# EAGLE board anemometer (EAGLE 6.4)
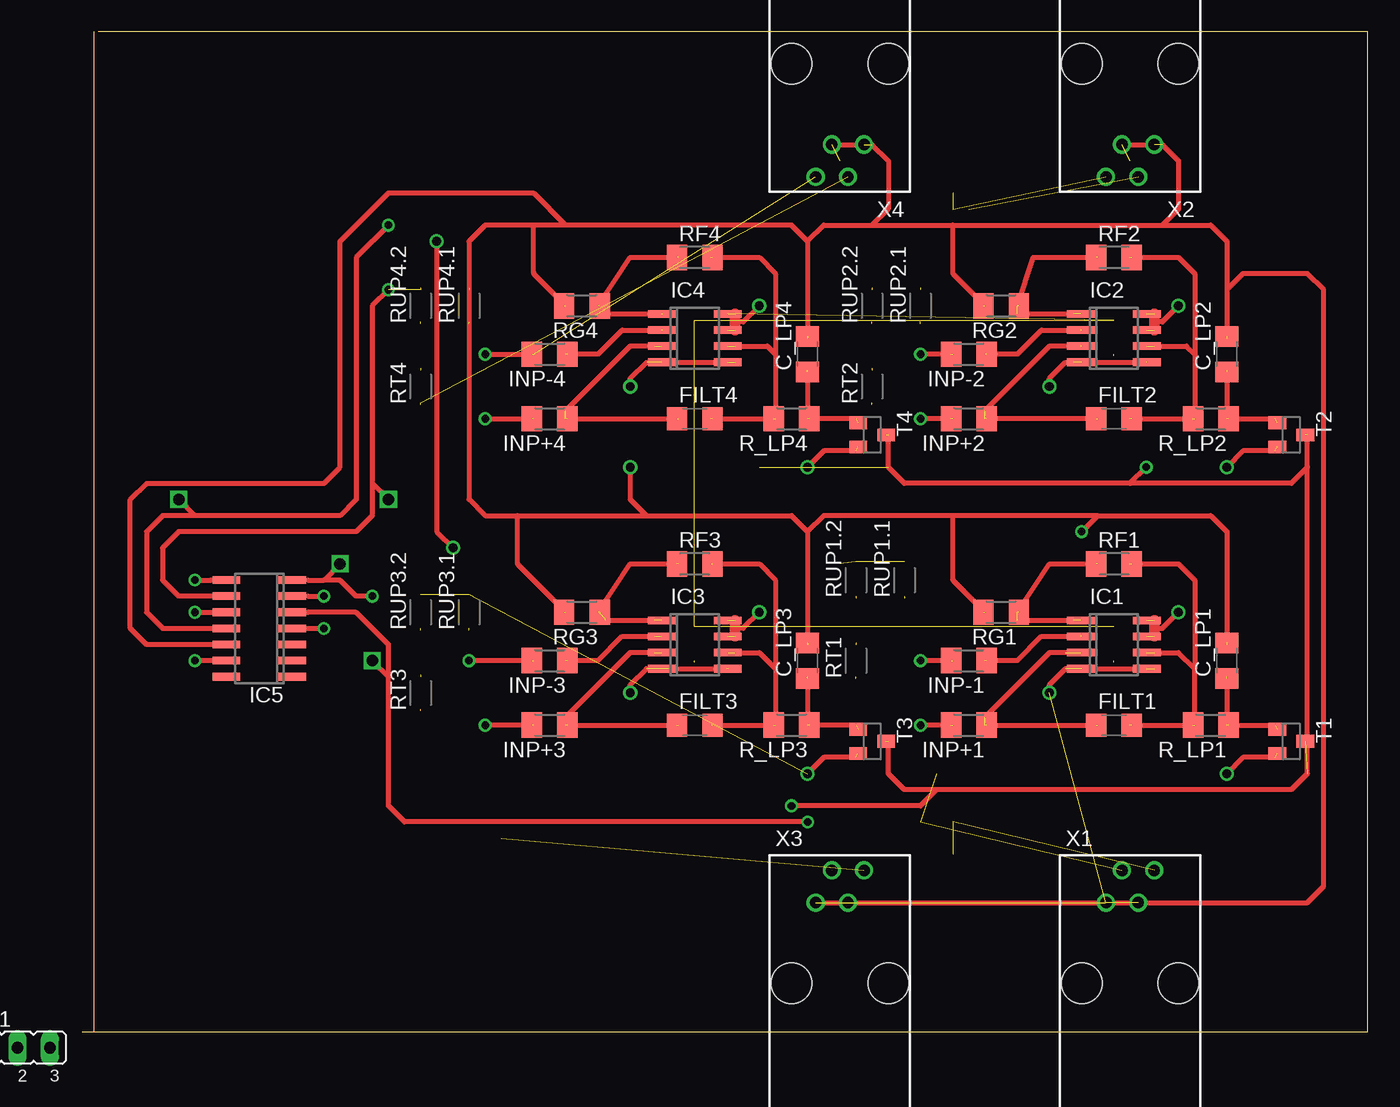
[diagram p0: board, top side]
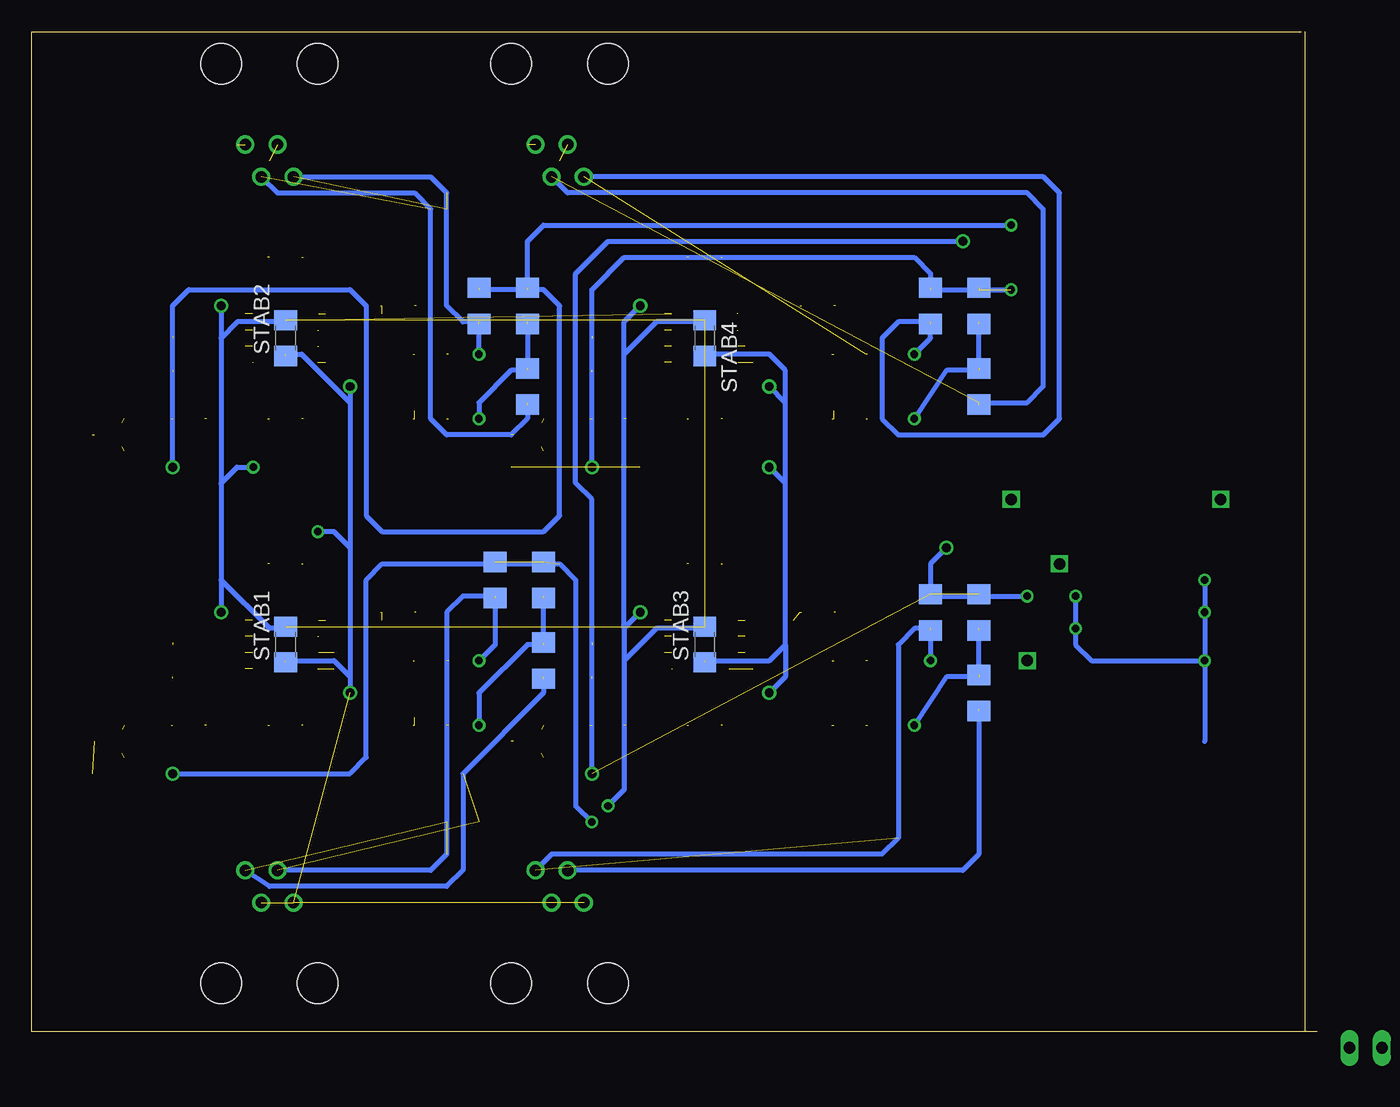
[diagram p1: board, bottom side, seen from below]

Size 101.27 x 78.73 mm. Coordinates in mm from the lower left corner, seen from the top.
Outline: 0,0 0.94,0
Outline: 0.94,0 101.27,0 101.27,78.73 1.27,78.73
Outline: 0.94,0 0.94,78.73
Copper layers (1*16): Top 0.035mm / dielectric 1.5mm / Bottom 0.035mm
Design rules "default": minimum track width 10mil, minimum drill 24mil, track to track 8mil, track to pad 8mil, pad to pad 8mil, via to via 8mil, smd to smd 8mil, copper to edge 40mil, drill to drill 8mil, minimum pad ring 10mil, minimum via ring 8mil, stop-mask expansion 4mil, vias tented up to drill 0mil, thermal gap 10mil

## Footprints (pad centres in the part's own frame; a part is rotated, then mirrored left to right if it is on the bottom)
C1206 = smd 1.6 x 1.8: 1 -1.4,0; 2 1.4,0
SO8 = smd 0.6 x 2.2: 1 -1.905,-2.6; 2 -0.635,-2.6; 3 0.635,-2.6; 4 1.905,-2.6; 5 1.905,2.6; 6 0.635,2.6; 7 -0.635,2.6; 8 -1.905,2.6
SO14 = smd 0.6 x 2.2: 1 -3.81,-2.6; 2 -2.54,-2.6; 3 -1.27,-2.6; 4 0,-2.6; 5 1.27,-2.6; 6 2.54,-2.6; 7 3.81,-2.6; 8 3.81,2.6; 9 2.54,2.6; 10 1.27,2.6; 11 0,2.6; 12 -1.27,2.6; 13 -2.54,2.6; 14 -3.81,2.6
M1206 = smd 1.6 x 2: 1 -1.4,0; 2 1.4,0
JP2 = drill 0.914 long: 1 -2.54,0; 2 0,0; 3 2.54,0
R1206 = smd 1.6 x 1.803 bottom: 1 -1.422,0; 2 1.422,0
SOT23 = smd 1 x 1.4: 1 -0.95,-1.1; 2 0.95,-1.1; 3 0,1.1
14867 = drill 0.9 pad 1.422: 1 -1.905,6.35; 2 -0.635,8.89; 3 0.635,6.35; 4 1.905,8.89 | hole 3.2: -3.81,0; 3.81,0

## Placement (x,y rotation side)
C_LP1  330nF  [C1206]  90.17,29.21 90 top
C_LP2  330nF  [C1206]  90.17,53.34 90 top
C_LP3  330nF  [C1206]  57.15,29.21 90 top
C_LP4  330nF  [C1206]  57.15,53.34 90 top
FILT1  100nF  [C1206]  81.28,24.13 0 top
FILT2  100nF  [C1206]  81.28,48.26 0 top
FILT3  100nF  [C1206]  48.26,24.13 0 top
FILT4  100nF  [C1206]  48.26,48.26 0 top
IC1  AD623R  [SO8]  81.28,30.48 270 top
IC2  AD623R  [SO8]  81.28,54.61 270 top
IC3  AD623R  [SO8]  48.26,30.48 270 top
IC4  AD623R  [SO8]  48.26,54.61 270 top
IC5  [SO14]  13.97,31.75 90 top
INP+1  100k  [M1206]  69.85,24.13 180 top
INP+2  100k  [M1206]  69.85,48.26 180 top
INP+3  100k  [M1206]  36.83,24.13 180 top
INP+4  100k  [M1206]  36.83,48.26 180 top
INP-1  100k  [M1206]  69.85,29.21 180 top
INP-2  100k  [M1206]  69.85,53.34 180 top
INP-3  100k  [M1206]  36.83,29.21 180 top
INP-4  100k  [M1206]  36.83,53.34 180 top
JP1  [JP2]  -5.08,-1.27 0 top
JP2  [JP2]  -13.97,-1.27 0 top  (outside the outline)
R_LP1  100  [M1206]  88.9,24.13 180 top
R_LP2  100  [M1206]  88.9,48.26 180 top
R_LP3  100  [M1206]  55.88,24.13 180 top
R_LP4  100  [M1206]  55.88,48.26 180 top
RF1  100k  [M1206]  81.28,36.83 0 top
RF2  100k  [M1206]  81.28,60.96 0 top
RF3  100k  [M1206]  48.26,36.83 0 top
RF4  100k  [M1206]  48.26,60.96 0 top
RG1  100  [M1206]  72.39,33.02 180 top
RG2  100  [M1206]  72.39,57.15 180 top
RG3  100  [M1206]  39.37,33.02 180 top
RG4  100  [M1206]  39.37,57.15 180 top
RT1  80  [R1206]  60.96,29.21 90 top
RT2  80  [R1206]  62.23,50.8 90 top
RT3  80  [R1206]  26.67,26.67 90 top
RT4  80  [R1206]  26.67,50.8 90 top
RUP1.1  10  [R1206]  64.77,35.56 90 top
RUP1.2  100  [R1206]  60.96,35.56 90 top
RUP2.1  10  [R1206]  66.04,57.15 90 top
RUP2.2  100  [R1206]  62.23,57.15 90 top
RUP3.1  10  [R1206]  30.48,33.02 90 top
RUP3.2  100  [R1206]  26.67,33.02 90 top
RUP4.1  10  [R1206]  30.48,57.15 90 top
RUP4.2  100  [R1206]  26.67,57.15 90 top
STAB1  100nF  [C1206]  81.28,30.48 90 bottom
STAB2  100nF  [C1206]  81.28,54.61 90 bottom
STAB3  100nF  [C1206]  48.26,30.48 90 bottom
STAB4  100nF  [C1206]  48.26,54.61 270 bottom
T1  BC846  [SOT23]  95.25,22.86 270 top
T2  BC846  [SOT23]  95.25,46.99 270 top
T3  BC846  [SOT23]  62.23,22.86 270 top
T4  BC846  [SOT23]  62.23,46.99 270 top
X1  14867  [14867]  82.55,3.81 0 top
X2  14867  [14867]  82.55,76.2 180 top
X3  14867  [14867]  59.69,3.81 0 top
X4  14867  [14867]  59.69,76.2 180 top

## Library data of the parts
C_LP1-C_LP4 FILT1-FILT4 STAB1-STAB4 = rcl
IC1-IC4 = analog-devices; MPN: AD623ARZ.; OC_FARNELL: 9426213; OC_NEWARK: 31M4186
IC5 = linear
INP+1-INP+4 INP-1-INP-4 R_LP1-R_LP4 RF1-RF4 RG1-RG4 RT1-RT4 RUP1.1 RUP1.2 RUP2.1 RUP2.2 RUP3.1 RUP3.2 RUP4.1 RUP4.2 = resistor
JP1 JP2 = jumper
T1-T4 = transistor
X1-X4 = con-4ucon; OC_FARNELL: unknown; OC_NEWARK: unknown

## Nets
AGND: IC5.8
DGND: IC5.7
GND: C_LP1.2 C_LP2.2 C_LP3.2 C_LP4.2 IC1.4 IC1.5 IC2.4 IC2.5 IC3.4 IC3.5 IC4.4 IC4.5 RG1.2 RG2.2 RG3.2 RG4.2 STAB1.1 STAB2.1 STAB3.1 STAB4.2 X1.1 X1.3 X2.1 X2.3 X3.1 X3.3 X4.1 X4.3
N$3: IC1.1 RF1.1 RG1.1
N$4: IC4.1 RF4.1 RG4.1
N$7: IC2.1 RF2.1 RG2.1
N$9: IC3.1 RF3.1 RG3.1
N$14: IC2.2 INP-2.1
N$19: IC1.2 INP-1.1
N$21: FILT2.1 IC2.3 INP+2.1
N$22: FILT3.1 IC3.3 INP+3.1
N$23: IC3.2 INP-3.1
N$24: FILT4.1 IC4.3 INP+4.1
N$25: IC4.2 INP-4.1
N$37: FILT1.1 IC1.3 INP+1.1
OUT1: C_LP1.1 R_LP1.1 T1.1
OUT1.1: FILT1.2 IC1.6 R_LP1.2 RF1.2
OUT2: C_LP2.1 R_LP2.1 T2.1
OUT2.1: FILT2.2 IC2.6 R_LP2.2 RF2.2
OUT3: C_LP3.1 R_LP3.1 T3.1
OUT3.1: FILT3.2 IC3.6 R_LP3.2 RF3.2
OUT4: C_LP4.1 R_LP4.1 T4.1
OUT4.1: FILT4.2 IC4.6 R_LP4.2 RF4.2
REF1: RT1.1 X1.2
REF2: RT2.1 X2.2
REF3: RT3.1 X3.2
REF4: RT4.1 X4.2
SUPL1: RUP1.1.2 RUP1.2.2 T1.2
SUPL2: RUP2.1.2 RUP2.2.2 T2.2
SUPL3: RUP3.1.2 RUP3.2.2 T3.2
SUPL4: RUP4.1.2 RUP4.2.2 T4.2
V1+: INP+1.2 RT1.2 RUP1.2.1
V1-: INP-1.2 RUP1.1.1 X1.4
V2+: INP+2.2 RT2.2 RUP2.2.1
V2-: INP-2.2 RUP2.1.1 X2.4
V3+: INP+3.2 RT3.2 RUP3.2.1
V3-: INP-3.2 RUP3.1.1 X3.4
V4+: INP+4.2 RT4.2 RUP4.2.1
V4-: INP-4.2 RUP4.1.1 X4.4
V+: IC1.7 IC1.8 IC2.7 IC2.8 IC3.7 IC3.8 IC4.7 IC4.8 STAB1.2 STAB2.2 STAB3.2 STAB4.1 T1.3 T2.3 T3.3 T4.3
VCC: IC5.14

## Tracks (layer width: path | path; a pad name or v marks a point on that pad's centre or on a via)
GND  (via drill 0.6, 0.7)  (33 unrouted)
  Top 0.406: v76.2,26.67 76.2,27.3 77.47,28.57 | 78.74,28.57 84.45,28.57 | 78.74,52.7 83.82,52.7 | v76.2,50.8 76.2,51.44 77.47,52.7 78.11,52.7 | 62.23,63.5 58.42,63.5 57.15,62.23 | 62.23,63.5 68.58,63.5 | 68.58,63.5 85.09,63.5 | 85.09,63.5 88.9,63.5 90.17,62.23 90.17,58.42 | 90.17,58.42 90.17,54.61 | 57.15,62.23 57.15,54.61 | 68.58,40.64 58.42,40.64 57.15,39.37 | 80.01,40.64 88.9,40.64 90.17,39.37 90.17,30.48 | 57.15,39.37 57.15,30.48 | 57.15,62.23 55.88,63.5 38.1,63.5 | 38.1,63.5 35.56,63.5 | 35.56,63.5 31.75,63.5 30.48,62.23 30.48,41.91 31.75,40.64 34.29,40.64 | 34.29,40.64 44.45,40.64 | 44.45,40.64 55.88,40.64 57.15,39.37 | 38.1,33.02 34.38,36.74 arc-45 34.29,36.96 34.29,40.64 | 38.1,57.15 35.65,59.6 arc-45 35.56,59.82 35.56,63.5 | 71.12,57.15 68.67,59.6 arc-45 68.58,59.82 68.58,63.5 | 71.12,33.02 68.67,35.47 arc-45 68.58,35.69 68.58,40.64 | v78.74,39.37 80.01,40.64 | 80.01,40.64 68.58,40.64 | v43.18,44.45 43.18,41.91 44.45,40.64 | 46.35,28.57 50.8,28.57 | 44.45,28.57 43.18,27.3 v43.18,26.67 | v43.18,50.8 43.18,51.44 44.45,52.7 51.44,52.7 | X4.3 62.23,69.85 63.5,68.58 63.5,64.77 62.23,63.5 | X2.3 85.09,69.85 86.36,68.58 86.36,64.77 85.09,63.5 | X3.1 96.52,10.16 97.79,11.43 97.79,58.42 96.52,59.69 91.44,59.69 90.17,58.42 | 10.16,30.48 5.08,30.48 3.81,31.75 3.81,41.91 5.08,43.18 19.05,43.18 20.32,44.45 20.32,62.23 24.13,66.04 35.56,66.04 38.1,63.5
  Bottom 0.406: v76.2,50.8 76.2,49.53 | 76.2,49.53 76.2,38.1 | 76.2,38.1 76.2,27.94 | 76.2,27.94 v76.2,26.67 | 76.2,38.1 77.47,39.37 v78.74,39.37 | 81.28,53.34 80.01,53.34 76.2,49.53 | 48.26,29.21 43.18,29.21 41.91,30.48 | 41.91,30.48 41.91,27.94 v43.18,26.67 | 41.91,30.48 41.91,43.18 | 41.91,43.18 v43.18,44.45 | 41.91,43.18 41.91,49.53 | 41.91,49.53 v43.18,50.8 | 41.91,49.53 41.91,52.07 43.18,53.34 48.26,53.34 | 81.28,29.21 77.47,29.21 76.2,27.94
N$1  (via drill 0.6)
  Top 0.406: 17.78,34.29 v19.05,34.29 | 17.78,31.75 v19.05,31.75 | v8.89,35.56 10.16,35.56 | v8.89,33.02 10.16,33.02 | 10.16,29.21 v8.89,29.21
  Bottom 0.406: v19.05,34.29 v19.05,31.75 19.05,30.48 17.78,29.21 v8.89,29.21 | v8.89,35.56 v8.89,33.02 v8.89,29.21 | v8.89,29.21 8.89,22.86
N$3  (4 unrouted)
  Top 0.406: 73.66,33.02 76.2,36.83 80.01,36.83 | 73.66,32.38 78.11,32.38
N$4  (3 unrouted)
  Top 0.406: 41.27,56.52 45.72,56.52 | 40.64,57.15 43.18,60.96 46.99,60.96
  Top 0.61: 40.64,57.15 41.27,56.52
N$7  (4 unrouted)
  Top 0.406: 73.66,57.15 74.93,60.96 80.01,60.96 | 73.66,56.52 78.11,56.52
N$9  (4 unrouted)
  Top 0.406: 40.64,33.02 43.18,36.83 46.99,36.83 | 41.27,32.38 45.09,32.38
N$14  (2 unrouted)
  Top 0.406: 78.74,55.24 75.56,55.24 73.66,53.34 71.12,53.34
N$19  (2 unrouted)
  Top 0.406: 78.74,31.11 75.56,31.11 73.66,29.21 71.12,29.21
N$21  (4 unrouted)
  Top 0.406: 78.74,53.98 76.2,53.98 71.12,48.9 | 80.01,48.26 71.12,48.26
N$22  (3 unrouted)
  Top 0.406: 45.09,29.84 43.18,29.84 38.1,24.77 | 38.1,24.13 46.99,24.13
  Top 0.61: 38.1,24.77 38.1,24.13
N$23  (2 unrouted)
  Top 0.406: 45.09,31.11 42.55,31.11 40.64,29.21 38.1,29.21
N$24  (4 unrouted)
  Top 0.406: 45.09,53.98 43.18,53.98 38.1,48.9 | 38.1,48.26 46.99,48.26
N$25  (2 unrouted)
  Top 0.406: 45.72,55.24 42.55,55.24 40.64,53.34 38.1,53.34
N$37  (4 unrouted)
  Top 0.406: 71.12,24.13 80.01,24.13 | 77.47,29.84 76.2,29.84 71.12,24.77
OUT1  (3 unrouted)
  Top 0.406: 93.98,24.13 90.17,24.13 90.17,27.94
OUT1.1  (4 unrouted)
  Top 0.406: 87.63,28.57 87.63,35.56 86.36,36.83 82.55,36.83 | 87.63,28.57 87.63,24.13 82.55,24.13 | 87.63,28.57 86.36,29.84 84.45,29.84
OUT2  (3 unrouted)
  Top 0.406: 93.98,48.26 90.17,48.26 90.17,52.07
OUT2.1  (4 unrouted)
  Top 0.406: 82.55,48.26 87.63,48.26 87.63,53.34 | 82.55,60.96 86.36,60.96 87.63,59.69 87.63,53.34 | 84.45,53.98 87,53.98 87.63,53.34
OUT3  (3 unrouted)
  Top 0.406: 60.96,24.13 57.15,24.13 57.15,27.94
OUT3.1  (4 unrouted)
  Top 0.406: 49.53,36.83 53.34,36.83 54.61,35.56 54.61,28.57 | 49.53,24.13 54.61,24.13 54.61,28.57 | 51.44,29.84 53.34,29.84 54.61,28.57
OUT4  (3 unrouted)
  Top 0.406: 60.96,48.26 57.15,48.26 57.15,52.07
OUT4.1  (4 unrouted)
  Top 0.406: 49.53,60.96 53.34,60.96 54.61,59.69 54.61,53.34 | 49.53,48.26 54.61,48.26 54.61,53.34 | 51.44,53.98 53.98,53.98 54.61,53.34
REF1  (3 unrouted)
  Bottom 0.406: 60.96,27.94 60.96,26.67 67.31,20.32 67.31,12.7 68.58,11.43 82.55,11.43 84.45,12.7
REF2  (2 unrouted)
  Bottom 0.406: 62.23,49.53 62.23,48.26 63.5,46.99 68.58,46.99 69.85,48.26 69.85,64.77 71.12,66.04 81.92,66.04 X2.2
REF3  (2 unrouted)
  Bottom 0.406: 26.67,25.4 26.67,13.97 27.94,12.7 X3.2
REF4  (2 unrouted)
  Bottom 0.406: 26.67,49.53 22.86,49.53 21.59,50.8 21.59,64.77 22.86,66.04 59.05,66.04 X4.2
SUPL1  (via drill 0.6, 0.7, 0.9)  (3 unrouted)
  Top 0.406: 93.98,21.59 91.44,21.59 v90.17,20.32 | v57.15,16.51 25.4,16.51 24.13,17.78 24.13,27.94 | 24.13,27.94 24.13,30.48 21.59,33.02 17.78,33.02 | v22.86,29.21 24.13,27.94
  Bottom 0.406: v90.17,20.32 76.2,20.32 74.93,21.59 74.93,35.56 73.66,36.83 59.69,36.83 58.42,35.56 58.42,17.78 v57.15,16.51
SUPL2  (via drill 0.6, 0.7, 0.9)  (3 unrouted)
  Top 0.406: 93.98,45.72 91.44,45.72 v90.17,44.45 | v24.13,63.5 21.59,60.96 21.59,41.91 20.32,40.64 8.89,40.64 | 8.89,40.64 6.35,40.64 5.08,39.37 5.08,33.02 6.35,31.75 11.43,31.75 | v7.62,41.91 8.89,40.64
  Bottom 0.406: v90.17,44.45 90.17,57.15 88.9,58.42 76.2,58.42 74.93,57.15 74.93,40.64 73.66,39.37 60.96,39.37 59.69,40.64 59.69,57.15 60.96,58.42 62.23,58.42 | 62.23,58.42 66.04,58.42 | 62.23,58.42 62.23,62.23 60.96,63.5 v24.13,63.5
SUPL3  (via drill 0.6, 0.7, 0.9)  (3 unrouted)
  Top 0.406: 60.96,21.59 58.42,21.59 v57.15,20.32 | v27.94,62.23 27.94,39.37 v29.21,38.1 | v22.86,34.29 21.59,34.29 20.32,35.56 19.05,35.56 | 17.78,35.56 19.05,35.56 | v20.32,36.83 19.05,35.56
  Bottom 0.406: v57.15,20.32 57.15,41.91 58.42,43.18 58.42,59.69 55.88,62.23 v27.94,62.23 | v29.21,38.1 30.48,36.83 30.48,34.29 v22.86,34.29
SUPL4  (via drill 0.6, 0.7, 0.9)  (4 unrouted)
  Top 0.406: 60.96,45.72 58.42,45.72 v57.15,44.45 | v24.13,58.42 22.86,57.15 22.86,43.18 | 22.86,43.18 22.86,40.64 21.59,39.37 7.62,39.37 6.35,38.1 6.35,35.56 7.62,34.29 10.16,34.29 | v24.13,41.91 22.86,43.18
  Bottom 0.406: v57.15,44.45 57.15,58.42 54.61,60.96 31.75,60.96 30.48,59.69 30.48,58.42 v24.13,58.42
V1+  (via drill 0.6)  (3 unrouted)
  Top 0.406: 68.58,24.13 v66.04,24.13
  Bottom 0.406: 60.96,34.29 60.96,30.48 62.23,30.48 66.04,26.67 v66.04,24.13
V1-  (via drill 0.6)  (4 unrouted)
  Top 0.406: 68.58,29.21 v66.04,29.21
  Bottom 0.406: v66.04,29.21 64.77,30.48 64.77,34.29 67.31,34.29 68.58,33.02 68.58,13.97 69.85,12.7 81.92,12.7
V2+  (via drill 0.6)  (3 unrouted)
  Top 0.406: 68.58,48.26 v66.04,48.26
  Bottom 0.406: 62.23,55.88 62.23,52.07 63.5,52.07 66.04,49.53 v66.04,48.26
V2-  (via drill 0.6)  (4 unrouted)
  Top 0.406: 68.58,53.34 v66.04,53.34
  Bottom 0.406: v66.04,53.34 66.04,55.88 67.31,55.88 68.58,57.15 68.58,66.04 69.85,67.31 X2.4
V3+  (via drill 0.6)  (3 unrouted)
  Top 0.406: 35.56,24.13 v31.75,24.13
  Bottom 0.406: 26.67,31.75 26.67,27.94 29.21,27.94 v31.75,24.13
V3-  (via drill 0.6)  (3 unrouted)
  Top 0.406: 35.56,29.21 v30.48,29.21
  Bottom 0.406: v30.48,29.21 30.48,31.75 31.75,31.75 33.02,30.48 33.02,15.24 34.29,13.97 60.33,13.97 X3.4
V4+  (via drill 0.6)  (3 unrouted)
  Top 0.406: v31.75,48.26 35.56,48.26
  Bottom 0.406: 26.67,55.88 26.67,52.07 29.21,52.07 v31.75,48.26
V4-  (via drill 0.6)  (3 unrouted)
  Top 0.406: v31.75,53.34 35.56,53.34
  Bottom 0.406: v31.75,53.34 30.48,54.61 30.48,55.88 33.02,55.88 34.29,54.61 34.29,48.26 33.02,46.99 21.59,46.99 20.32,48.26 20.32,66.04 21.59,67.31 X4.4
V+  (via drill 0.6, 0.7)  (17 unrouted)
  Top 0.406: 63.5,46.99 63.5,44.45 64.77,43.18 82.55,43.18 | 82.55,43.18 95.25,43.18 96.52,44.45 | 96.52,44.45 96.52,46.99 | 96.52,44.45 96.52,20.32 95.25,19.05 67.31,19.05 | 63.5,22.86 63.5,20.32 64.77,19.05 67.31,19.05 | 67.31,19.05 66.04,17.78 v55.88,17.78 | v86.36,57.15 85.09,55.88 84.45,55.88 | 84.45,31.75 85.09,31.75 v86.36,33.02 | v83.82,44.45 82.55,43.18 | 51.44,31.75 52.07,31.75 v53.34,33.02 | v53.34,57.15 52.07,55.88 51.44,55.88
  Top 0.813: 84.45,56.52 84.45,55.88 84.45,55.24 | 84.45,31.11 84.45,31.75 84.45,32.38 | 51.44,31.11 51.44,31.75 51.44,32.38 | 51.44,55.24 51.44,55.88 51.44,56.52
  Bottom 0.406: 54.61,31.75 54.61,29.21 | 54.61,29.21 54.61,19.05 v55.88,17.78 | v86.36,57.15 86.36,54.61 | 86.36,54.61 86.36,43.18 | 86.36,43.18 86.36,35.56 | 86.36,35.56 v86.36,33.02 | 86.36,43.18 85.09,44.45 v83.82,44.45 | 81.28,55.88 85.09,55.88 86.36,54.61 | 81.28,31.75 82.55,31.75 86.36,35.56 | v53.34,33.02 54.61,31.75 | 48.26,31.75 52.07,31.75 54.61,29.21 | 54.61,31.75 54.61,53.34 | 54.61,53.34 54.61,55.88 v53.34,57.15 | 48.26,55.88 52.07,55.88 54.61,53.34